# Altium PCB maxout_conn.PcbDoc
Units mil, origin at the board's own origin, x right, y up, seen from the top; angles counter-clockwise.
Board outline 1878 x 2120 mil, 2 copper layers (Top Layer, Bottom Layer); 29 components, 58 nets, 219 pads, 37 vias.
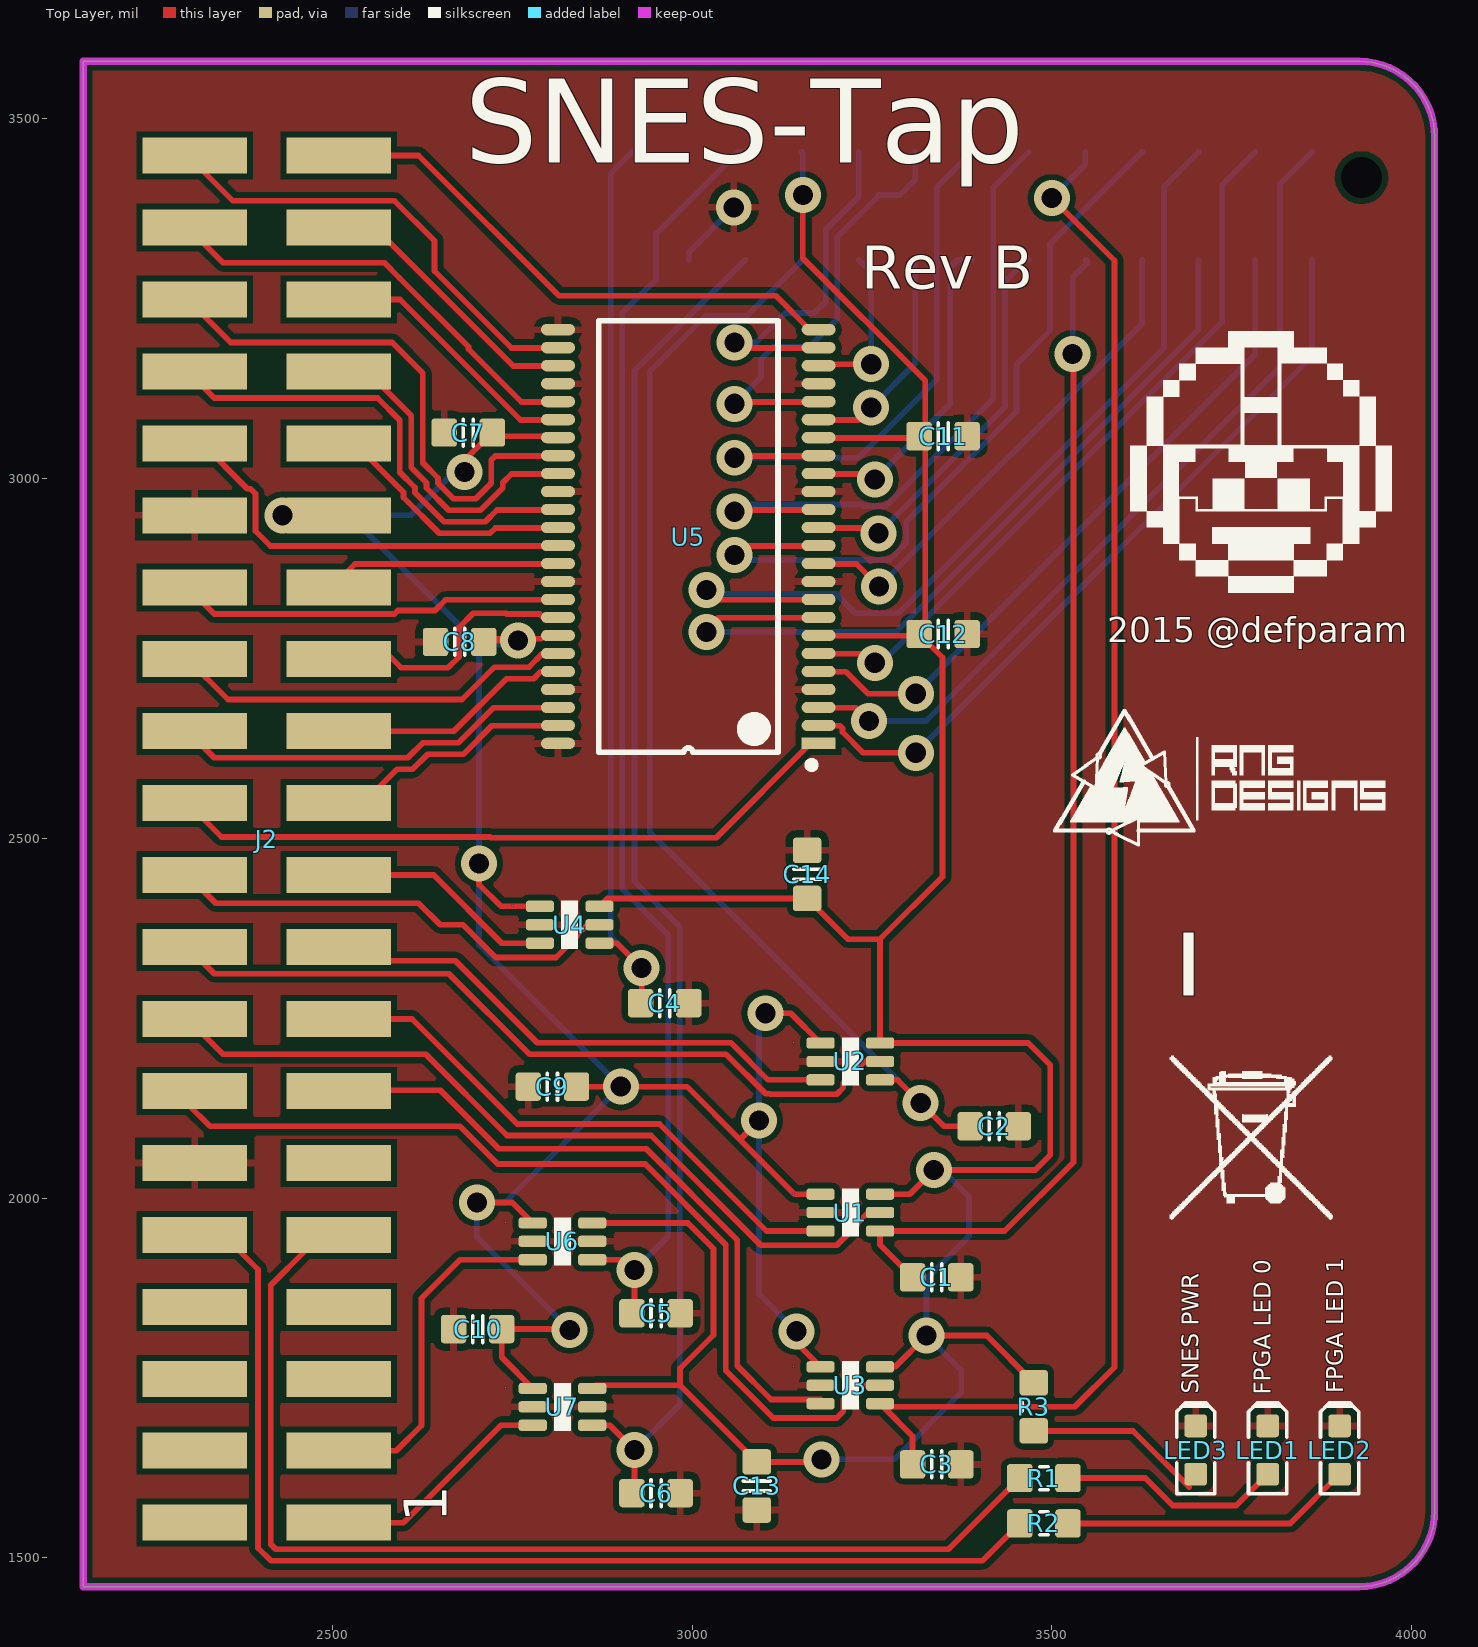
[diagram p0: Top Layer view]
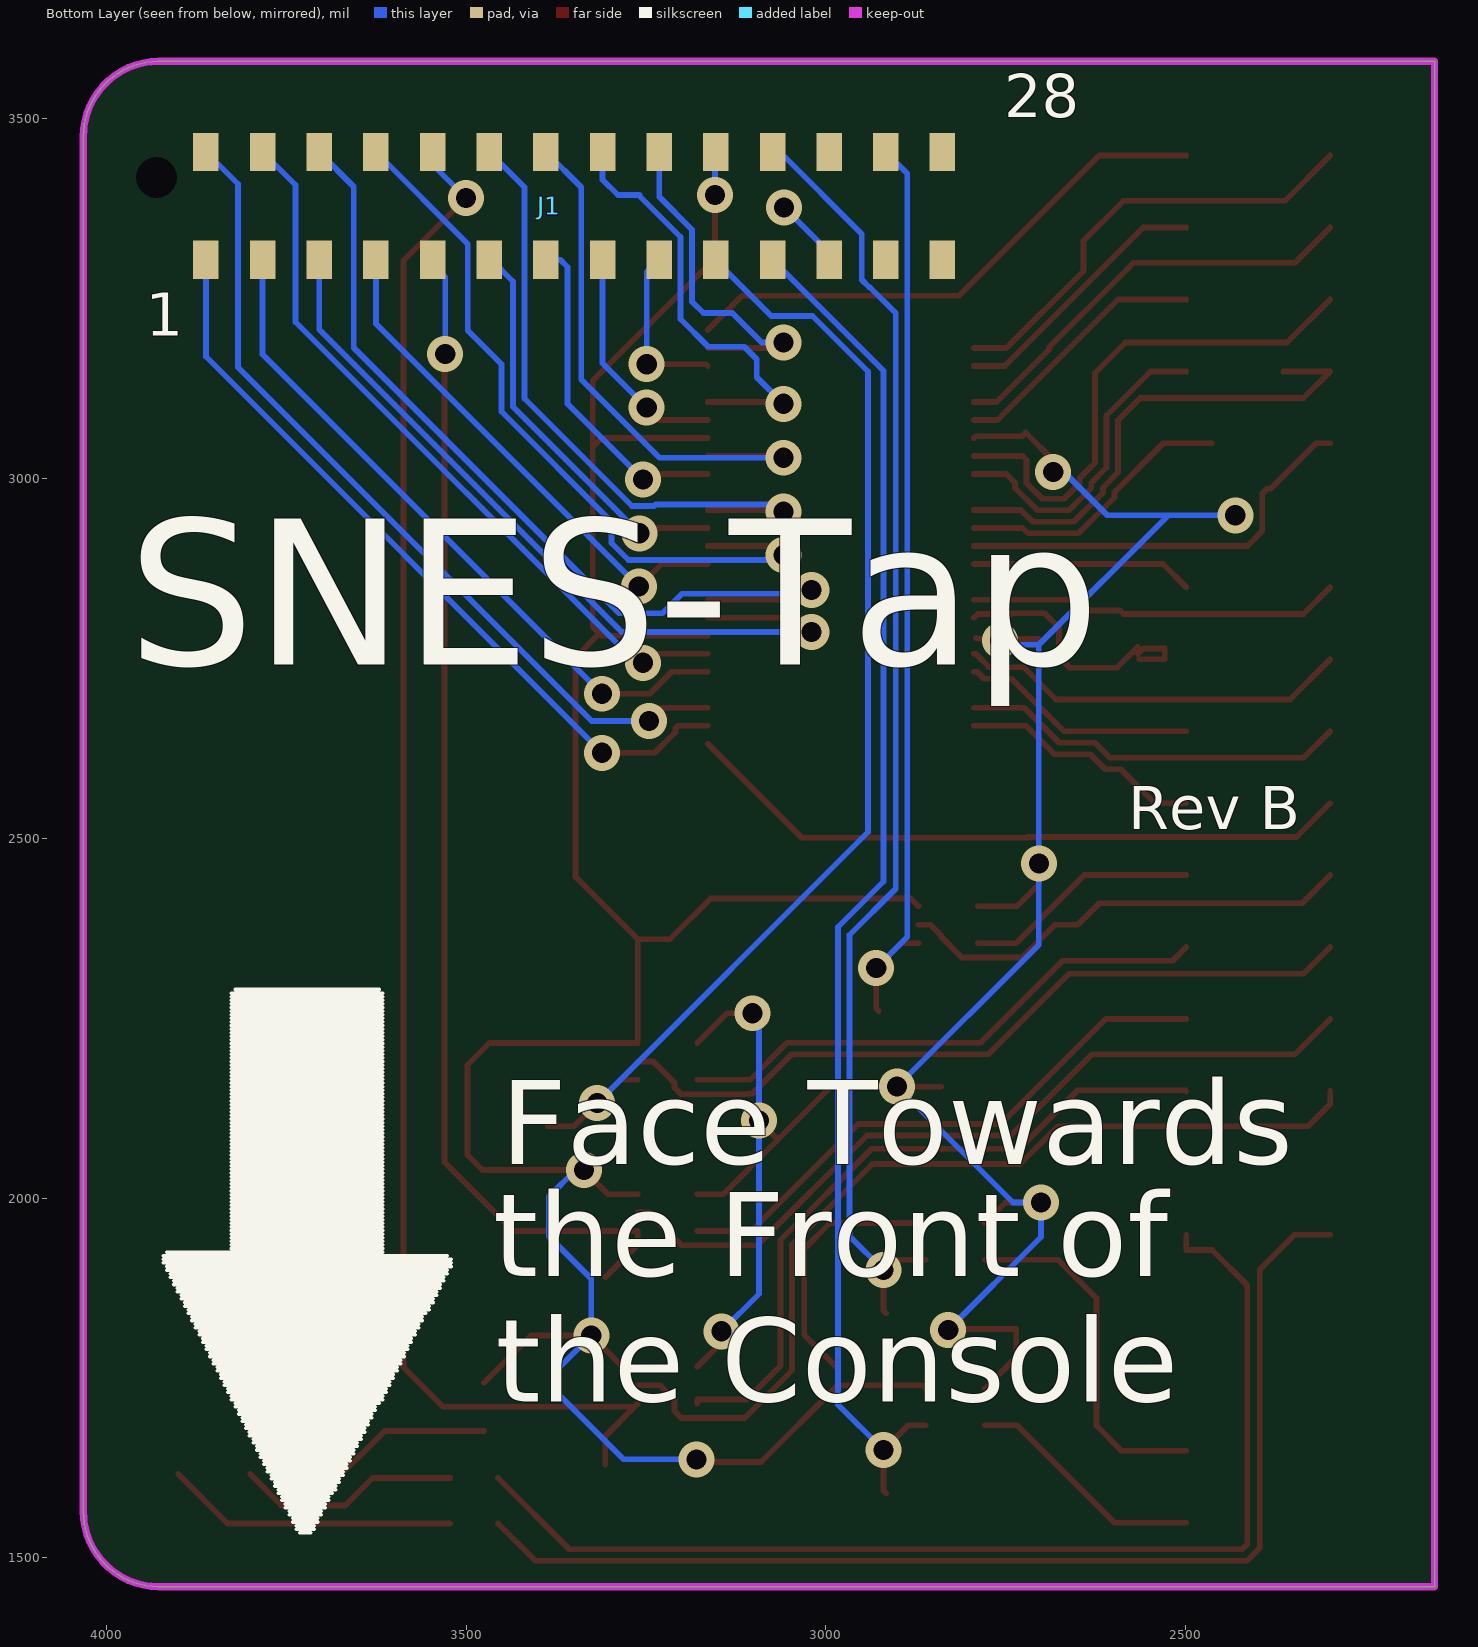
[diagram p1: Bottom Layer view, seen from below]
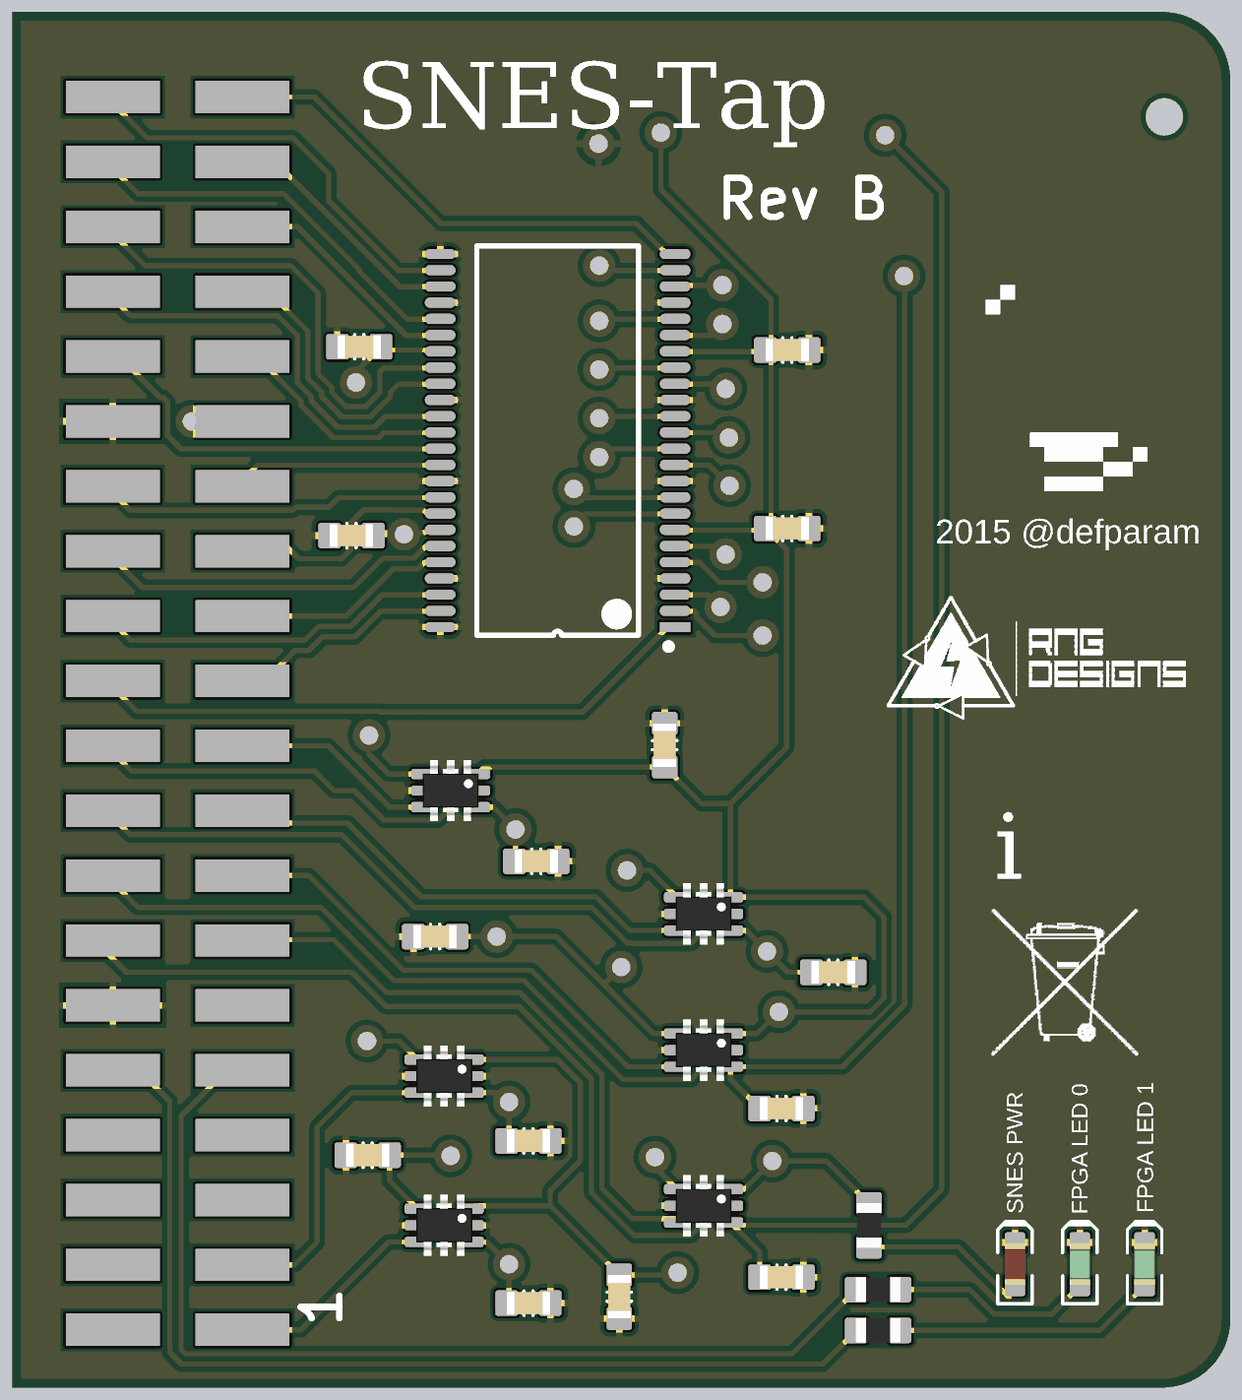
[diagram p2: 3D render of the assembled board from above, using the file's embedded part models]

## Layer stack, top to bottom
Top Solder: solder mask 0.4, Solder Resist, Dk 3.5
Top Layer: signal copper 1.4
Dielectric 1: dielectric 12.6, FR-4, Dk 4.8
Bottom Layer: signal copper 1.4
Bottom Solder: solder mask 0.4, Solder Resist, Dk 3.5

## Board outline
2154,1460 2154,3580 3927,3580 cw(c3927,3475) 4032,3475 4032,1565 cw(c3927,1565) 3927,1460

## Design rules (kind name [scope] priority, off if disabled: settings)
Clearance [All] p1: gap=8
PolygonConnect [All] p1: connectstyle=Relief reliefconductorwidth=10 reliefentries=4 polygonreliefangle="90 Angle" airgapwidth=10
RoomDefinition maxout_conn [InComponentClass('maxout_conn')] p1: confinementstyle=ConfineOut formatcopy=TRUE lockcomponents=FALSE outline 1685,0 4170,0 ccw(c4170,100) 4270,100 4270,830 ccw(c4260,830) 4260,840 1680,840
RoutingVias [All] p1: holewidth=25 width=40 viastyle="Through Hole" minholewidth=28 minwidth=50 maxholewidth=28 maxwidth=50
SolderMaskExpansion [All] p1: expansion=4
UnpouredPolygon [All] p1: allowunpoured=FALSE
Width [All] p1: maxlimit=8 minlimit=8 preferedwidth=8
29 further rules are at their usual default settings.

## Components (designator, comment, footprint, x,y, rotation, side; value= is the part's Value field where it differs from the comment)
C1 "10p" CAPC1608X90N 3340,1890 r0 top
C2 "10p" CAPC1608X90N 3420,2100 r0 top
C3 "10p" CAPC1608X90N 3340,1630 r0 top
C4 "10p" CAPC1608X90N 2962,2271 r0 top
C5 "10p" CAPC1608X90N 2950,1840 r0 top
C6 "10p" CAPC1608X90N 2950,1590 r0 top
C7 "approved sub OK" CAPC1608X90N 2689,3064 r180 top
C8 "approved sub OK" CAPC1608X90N 2677,2773 r180 top
C9 "approved sub OK" CAPC1608X90N 2806,2155 r180 top
C10 "approved sub OK" CAPC1608X90N 2702,1818 r180 top
C11 "approved sub OK" CAPC1608X90N 3349,3059 r0 top
C12 "approved sub OK" CAPC1608X90N 3349,2784 r0 top
C13 "approved sub OK" CAPC1608X90N 3090,1600 r270 top
C14 "approved sub OK" CAPC1608X90N 3160,2450 r90 top
J1 "SNESConn" SNES-MEC2-CONN 2769,3379 r0 top
J2 "DE0nanoIDC_40" SNESConnIDC_40 2408.98,2849 r270 top
LED1 "Green" LED-0603-GREEN 3800,1650 r90 top
LED2 "Green" LED-0603-GREEN 3900,1650 r90 top
LED3 "Red" LED-0603-RED 3700,1650 r90 top
R1 "Thick Film" RESC1608X55N 3489,1611 r0 top
R2 "Thick Film" RESC1608X55N 3489,1548 r0 top
R3 "Thick Film" RESC1608X55N 3475,1710 r270 top
U1 "74LVCH1T45" SOT363 3220,1980 r0 top
U2 "74LVCH1T45" SOT363 3220,2190 r0 top
U3 "74LVCH1T45" SOT363 3220,1740 r0 top
U4 "74LVCH1T45" SOT363 2830,2380 r0 top
U5 "74ALVC164245" SSOP48 3181,3247 r180 top
U6 "74LVCH1T45" SOT363 2820,1940 r0 top
U7 "74LVCH1T45" SOT363 2820,1710 r0 top

## Footprints (in the part's own frame and the unit in brackets; to place one, negate y for a bottom-side part, rotate by r counter-clockwise, add the part's x,y. Pads: shape width x height; smd on the part's side, far side on the other; paste and mask are expansions set on the pad)
CAPC1608X90N [mm] "Chip Capacitor, Body 1.6x0.8mm, EIA 0603, IPC Medium Density"
  round 0.254 on Mech15: 0(0,0)
  rrect25% 0.9x1 smd: 1(-0.85,0) 2(0.85,0)
  Top Layer pour cut-out: -0.6,0.5 -0.4,0.7 0.4,0.7 0.6,0.5 0.6,-0.5 0.4,-0.7 -0.4,-0.7 -0.6,-0.5
  silkscreen extent -0.18,-0.48 0.18,0.48, body extent -0.85,-0.45 0.85,0.45, height 0.89
LED-0603-GREEN [mm]
  round 0.254 on Mech15: 0(0,0)
  rrect25% 0.8x0.8 smd: A(-0.85,0) K(0.85,0)
  Top Layer pour cut-out: -0.5,0.5 0.5,0.5 0.5,-0.5 -0.5,-0.5
  silkscreen extent -1.55,-0.67 1.68,0.67, body extent -0.8,-0.4 0.8,0.4, height 0.75
LED-0603-RED [mm]
  round 0.254 on Mech15: 0(0,0)
  rrect25% 0.8x0.8 smd: A(-0.85,0) K(0.85,0)
  Top Layer pour cut-out: -0.5,0.5 0.5,0.5 0.5,-0.5 -0.5,-0.5
  silkscreen extent -1.55,-0.67 1.68,0.67, body extent -0.8,-0.4 0.8,0.4, height 0.75
RESC1608X55N [mm] "Chip Resistor, Body 1.6x0.8mm, EIA 0603, IPC Medium Density"
  round 0.254 on Mech15: 0(0,0)
  rrect25% 0.9x1 smd: 1(-0.85,0) 2(0.85,0)
  Top Layer pour cut-out: -0.6,0.5 -0.4,0.7 0.4,0.7 0.6,0.5 0.6,-0.5 0.4,-0.7 -0.4,-0.7 -0.6,-0.5
  silkscreen extent -0.15,-0.41 0.15,0.41, body extent -0.87,-0.47 0.88,0.48, height 0.54
SNES-MEC2-CONN [mm] "Male connector for the EXT socket on the SNES"
  rect 0.9x1.35 smd far side: 1(27.75,-1.9) 2(27.75,1.9) 3(25.75,-1.9) 4(25.75,1.9) 5(23.75,-1.9) 6(23.75,1.9) 7(21.75,-1.9) 8(21.75,1.9) 9(19.75,-1.9) 10(19.75,1.9) 11(17.75,-1.9) 12(17.75,1.9) 13(15.75,-1.9) 14(15.75,1.9) 15(13.75,-1.9) 16(13.75,1.9) 17(11.75,-1.9) 18(11.75,1.9) 19(9.75,-1.9) 20(9.75,1.9) 21(7.75,-1.9) 22(7.75,1.9) 23(5.75,-1.9) 24(5.75,1.9) 25(3.75,-1.9) 26(3.75,1.9) 27(1.75,-1.9) 28(1.75,1.9)
  round 0 hole 1.45: ""(29.5,1)
  body extent 1.3,-2.58 30.4,2.58, height 5
SNESConnIDC_40 [mil]
  rect 50x145 smd: 1(1300,100) 2(1300,-100) 3(1200,100) 4(1200,-100) 5(1100,100) 6(1100,-100) 7(1000,100) 8(1000,-100) 9(900,100) 10(900,-100) 11(800,100) 12(800,-100) 13(700,100) 14(700,-100) 15(600,100) 16(600,-100) 17(500,100) 18(500,-100) 19(400,100) 20(400,-100) 21(300,100) 22(300,-100) 23(200,100) 24(200,-100) 25(100,100) 26(100,-100) 27(0,100) 28(0,-100) 29(-100,100) 30(-100,-100) 31(-200,100) 32(-200,-100) 33(-300,100) 34(-300,-100) 35(-400,100) 36(-400,-100) 37(-500,100) 38(-500,-100) 39(-600,100) 40(-600,-100)
  body extent -625,-150 1325,150, height 250
SOT363 [mm] "Small outline 2.1mm L x 1.25mm W x 1mm H"
  round 0.5 on Mech15: 0(0,0)
  rrect50% 1x0.4 smd: 1(-1.05,0.65) 2(-1.05,0) 3(-1.05,-0.65) 4(1.05,-0.65) 5(1.05,0) 6(1.05,0.65)
  silkscreen extent -0.3,-0.85 0.3,0.85, body extent -1.2,-1.1 1.2,1.1, height 1.1
SSOP48 [mm] "SOP, 48-Leads, Body 15.88x7.50mm, Pitch 0.64mm, IPC Medium Density"
  rect 1.2x0.4 smd: 1(0.127,15.621)
  oval 1.2x0.4 smd: 2(0.127,14.986) 3(0.127,14.351) 4(0.127,13.716) 5(0.127,13.081) 6(0.127,12.446) 7(0.127,11.811) 8(0.127,11.176) 9(0.127,10.541) 10(0.127,9.906) 11(0.127,9.271) 12(0.127,8.636) 13(0.127,8.001) 14(0.127,7.366) 15(0.127,6.731) 16(0.127,6.096) 17(0.127,5.461) 18(0.127,4.826) 19(0.127,4.191) 20(0.127,3.556) 21(0.127,2.921) 22(0.127,2.286) 23(0.127,1.651) 24(0.127,1.016) 25(9.327,1.016) 26(9.327,1.651) 27(9.327,2.286) 28(9.327,2.921) 29(9.327,3.556) 30(9.327,4.191) 31(9.327,4.826) 32(9.327,5.461) 33(9.327,6.096) 34(9.327,6.731) 35(9.327,7.366) 36(9.327,8.001) 37(9.327,8.636) 38(9.327,9.271) 39(9.327,9.906) 40(9.327,10.541) 41(9.327,11.176) 42(9.327,11.811) 43(9.327,12.446) 44(9.327,13.081) 45(9.327,13.716) 46(9.327,14.351) 47(9.327,14.986) 48(9.327,15.621)
  silkscreen extent 0.26,0.7 7.89,16.51, body extent 0.92,0.36 8.52,16.36, height 2.8

## Part data
C1 C2 C3 C4 C5 C6: library part CAPC_10p_0603_NP0_1%_50V, "Capacitor SMD Cer 10pF 5% 50V NP0 0603"
C7 C8 C9 C10 C11 C12 C13 C14: library part CAPC_100n_0603_X7R_50V_10%, "Capacitor SMD Cer 100nF 10% 50V X7R 0603"
LED1 LED2: library part LED_SMD_Green_0603_570nm, "LED 0603 SMD Green 570nm 50mcd 20mA"
LED3: library part LED_SMD_Red_0603_220mcd, "LED 0603 SMD Hyper Red 630nm 220mcd 20mA"
R1 R2: library part RES_200R_0603_5%, "Resistor SMD chip 200 Ohm 0.1W 5% 0603"
R3: library part RES_270R_0603_5%, "Resistor SMD chip 270 Ohm 0.1W 5% 0603"
U1 U2 U3 U4 U6 U7: library part 74AVCH1T45, "Dual-supply voltage level translator/transceiver; 3-state"
U5: "16-bit dual supply translating transceiver; 3-state"

## Via types
v1: diameter 50, hole 28, Top Layer to Bottom Layer, tented both sides, 37 vias

## Nets (pads, with @x,y where several pads share a name; then routed paths per layer and width w, separated by ;. In a path a pad name is that pad's centre, name@x,y a point inside that pad or via, vN(x,y) a via of type N, cw(c..) or ccw(c..) an arc to the next point about the centre after c; other vN are vias at no path point)
GND: C1.2 C2.2 C3.2 C4.2 C5.2 C6.2 C7.2 C8.2 C9.2 C10.2 C11.2 C12.2 C13.2 C14.2 J1.23 J2.12 J2.30 LED1.K LED2.K LED3.K U1.2 U2.2 U3.2 U4.2 U5.4 U5.10 U5.15 U5.21 U5.25 U5.28 U5.34 U5.39 U5.45 U5.48 U6.2 U6.5 U7.2 U7.5 | length 98.7
  Bottom Layer w8: J1.23 2995.38,3314.38 v1(3058,3377)
NetC1_1: C1.1 J1.9 U1.4 | length 1701.1
  Top Layer w8: C1.1 3261.34,1935.2 U1.4 3434.41,1954.41 3530,2050 3530,3186 3543,3173 v1(3529,3173)
  Bottom Layer w8: v1(3529,3173) 3529,3279.76 3550,3300.76 J1.9
NetC2_1: C2.1 J1.19 U2.4 | length 1601
  Top Layer w8: U2.4 3285.59,2164.41 v1(3317.8,2132.2) 3350,2100 C2.1
  Bottom Layer w8: J1.19 3152.86,3302.86 3076,3226 3018.63,3226 2941.31,3148.69 2941.31,2508.69 v1(3317.8,2132.2)
NetC3_1: C3.1 J1.10 U3.4 | length 2191.3
  Top Layer w8: U3.4 U3.4@3265.75,1710 ; C3.1 3306.54,1669.21 U3.4@3265.75,1710 ; v1(3500,3390) 3587,3303 3587,1765 3532,1710 U3.4@3265.75,1710
  Bottom Layer w8: v1(3500,3390) 3546.56,3436.56 J1.10
NetC4_1: C4.1 J1.26 U4.4 | length 1298.3
  Top Layer w8: U4.4 2895.59,2354.41 v1(2930,2320) 2930,2263.46 C4.1@2926.54,2260
  Bottom Layer w8: J1.26 2886.92,3424.09 2886.92,2363.08 v1(2930,2320)
NetC5_1: C5.1 J1.22 U6.4 | length 1803.3
  Top Layer w8: U6.4 2905.59,1914.41 v1(2920,1900) 2920,1843.46 C5.1
  Bottom Layer w8: v1(2920,1900) 2967,1947 2967,2365.92 2902.92,2430 2902.92,3230 2938.54,3265.62 2939.32,3265.62 2950,3276.3 2950,3340 3063.8,3453.8 J1.22
NetC6_1: C6.1 J1.21 U7.4 | length 1904.6
  Top Layer w8: U7.4 2885.59,1684.41 v1(2920,1650) 2920,1593.46 C6.1
  Bottom Layer w8: v1(2920,1650) 2983,1713 2983,2377 2920,2440 2920,3150 3074.12,3304.12 J1.21
NetJ1_1: J1.1 U5.2 | length 1078.8
  Top Layer w8: U5.2@3164.04,2656.5 3205.5,2656.5 3209,2653 3209,2647.67 3237.67,2619 v1(3311,2619)
  Bottom Layer w8: v1(3311,2619) 3861.52,3169.52 J1.1
NetJ1_2: J1.2 U5.3 | length 1181.9
  Top Layer w8: U5.3@3164.04,2681.5 3227.5,2681.5 v1(3246,2663)
  Bottom Layer w8: v1(3246,2663) 3325.33,2663 3817,3154.67 3817,3409.28 J1.2
NetJ1_3: J1.3 U5.5 | length 958.2
  Top Layer w8: U5.5@3164.04,2731.5 3214.17,2731.5 3244.67,2701 v1(3311,2701)
  Bottom Layer w8: v1(3311,2701) 3782.78,3172.78 J1.3
NetJ1_4: J1.4 U5.6 | length 1029.4
  Top Layer w8: U5.6@3164.04,2756.5 3241.5,2756.5 v1(3254,2744)
  Bottom Layer w8: v1(3254,2744) 3263.25,2744 3737,3217.75 3737,3408.02 J1.4
NetJ1_5: J1.5 U5.8 | length 1108.8
  Top Layer w8: v1(3020,2787) 3020,2790 3036.5,2806.5 U5.8@3164.04,2806.5
  Bottom Layer w8: v1(3020,2787) 3283.63,2787 3704.04,3207.41 J1.5
NetJ1_6: J1.6 U5.9 | length 1243.4
  Top Layer w8: v1(3020,2845) 3033.5,2831.5 U5.9@3164.04,2831.5
  Bottom Layer w8: v1(3020,2845) 3025,2840 3200,2840 3227,2813 3287,2813 3656,3182 3656,3405.76 J1.6
NetJ1_7: J1.7 U5.11 | length 714.5
  Top Layer w8: U5.11@3164.04,2881.5 3228.5,2881.5 v1(3260,2850)
  Bottom Layer w8: v1(3260,2850) 3625.3,3215.3 J1.7
NetJ1_8: J1.8 U5.12 | length 1040.6
  Top Layer w8: v1(3059,2894) 3071.5,2906.5 U5.12@3164.04,2906.5
  Bottom Layer w8: v1(3059,2894) 3066,2887 3274.33,2887 3297.81,2910.49 3297.81,2940.19 3450.8,3093.17 3450.8,3159 3497.54,3205.74 3497.54,3326.04 J1.8
NetJ1_11: J1.11 U5.13 | length 566.4
  Top Layer w8: U5.13@3164.04,2931.5 3251.5,2931.5 v1(3259,2924)
  Bottom Layer w8: v1(3259,2924) 3434.8,3099.8 3434.8,3274 3464.99,3304.2 J1.11
NetJ1_12: J1.12 U5.14 | length 895.4
  Top Layer w8: v1(3059,2954) 3061.5,2956.5 U5.14@3164.04,2956.5
  Bottom Layer w8: v1(3059,2954) 3069,2964 3236.67,2964 3238.67,2962 3269.33,2962 3418.8,3111.47 3418.8,3404.78 J1.12
NetJ1_13: J1.13 U5.16 | length 465.9
  Top Layer w8: U5.16@3164.04,3006.5 3246.5,3006.5 v1(3254,2999)
  Bottom Layer w8: v1(3254,2999) 3359,3104 3359,3294 3369.2,3304.2 J1.13
NetJ1_14: J1.14 U5.17 | length 768.5
  Top Layer w8: v1(3059,3029) 3061.5,3031.5 U5.17@3164.04,3031.5
  Bottom Layer w8: v1(3059,3029) 3231.33,3029 3340.06,3137.73 3340.06,3404.78 J1.14
NetJ1_15: J1.15 U5.19 | length 322.8
  Top Layer w8: U5.19@3164.04,3081.5 3231.5,3081.5 v1(3249,3099)
  Bottom Layer w8: v1(3249,3099) 3310.34,3160.34 J1.15
NetJ1_16: J1.16 U5.20 | length 606.8
  Top Layer w8: v1(3059,3104) 3061.5,3106.5 U5.20@3164.04,3106.5
  Bottom Layer w8: v1(3059,3104) 3096,3141 3096,3166 3113.3,3183.3 3163.3,3183.3 3201.88,3221.88 3201.88,3335.74 3259,3392.86 3259,3394 3289,3394 3310.34,3415.34 J1.16
NetJ1_17: J1.17 U5.22 | length 238.4
  Top Layer w8: U5.22@3164.04,3156.5 3166.54,3159 v1(3249,3159)
  Bottom Layer w8: J1.17 3249,3286.8 v1(3249,3159)
NetJ1_18: J1.18 U5.23 | length 485.4
  Top Layer w8: v1(3059,3189) 3066.5,3181.5 U5.23@3164.04,3181.5
  Bottom Layer w8: v1(3059,3189) 3089,3189 3130,3230 3170,3230 3185.88,3245.88 3185.88,3345.88 3231.6,3391.6 J1.18
NetJ2_1: J2.1 U7.3 | length 335.7
  Top Layer w8: J2.1@2499,1549 2599,1549 2734.41,1684.41 U7.3
NetJ2_3: J2.3 U6.3 | length 493.3
  Top Layer w8: J2.3@2499,1649 2589,1649 2624,1684 2624,1861 2677.41,1914.41 U6.3
NetJ2_9: J2.9 R1.1 | length 1570.7
  Top Layer w8: J2.9@2499,1949 2499,1928 2463.53,1928 2414.5,1878.97 2414.5,1519.03 2421.53,1512 3356.54,1512 R1.1
NetJ2_10: J2.10 R2.1 | length 1592.5
  Top Layer w8: J2.10@2299,1949 2349,1949 2397,1901 2397,1513.9 2414.9,1496 3403.54,1496 R2.1
NetJ2_13: J2.13 U3.3 | length 966.4
  Top Layer w8: J2.13@2499,2149 2500,2150 2650,2150 2731.31,2068.69 2936.31,2068.69 3063,1942 3063,1767 3109.87,1720.13 3178.66,1720.13 U3.3
NetJ2_14: J2.14 U3.5 | length 1291.9
  Top Layer w8: J2.14@2299,2149 2299,2131 2330,2100 2677.37,2100 2730,2047.37 2935,2047.37 3047,1935.37 3047,1760.37 3112.84,1694.54 3201.01,1694.54 3210.35,1703.87 3210.35,1719.92 3230.43,1740 U3.5
NetJ2_15: J2.15 U1.3 | length 801.7
  Top Layer w8: J2.15@2499,2249 2611,2249 2757,2103 2955,2103 3103.59,1954.41 U1.3
NetJ2_16: J2.16 U1.5 | length 1112.5
  Top Layer w8: J2.16@2299,2249 2348,2200 2630,2200 2743,2087 2943,2087 3095.46,1934.54 3201.01,1934.54 3229.65,1963.18 3229.65,1964.95 3244.71,1980 U1.5
NetJ2_17: J2.17 U2.3 | length 756.1
  Top Layer w8: J2.17@2499,2349 2518,2330 2671,2330 2785,2216 3054,2216 3105.59,2164.41 U2.3
NetJ2_18: J2.18 U2.5 | length 1069.7
  Top Layer w8: J2.18@2299,2349 2336,2312 2662,2312 2774,2200 3047.37,2200 3102.37,2145 3108.33,2145 3108.79,2144.54 3201.01,2144.54 3210.35,2153.87 3210.35,2160.35 3240,2190 U2.5
NetJ2_19: J2.19 U4.3 | length 328.8
  Top Layer w8: J2.19@2499,2449 2641,2449 2735.59,2354.41 U4.3
NetJ2_20: J2.20 U4.5 | length 639.6
  Top Layer w8: J2.20@2299,2449 2338,2410 2620,2410 2650,2380 2681.63,2380 2727.09,2334.54 2811.01,2334.54 2839.65,2363.18 2839.65,2364.95 2854.71,2380 U4.5
NetJ2_21: J2.21 U5.47 | length 339.5
  Top Layer w8: J2.21@2499,2549 2543.13,2549 2590.13,2596 2611.63,2596 2632.63,2617 2682.25,2617 2721.75,2656.5 U5.47@2793.96,2656.5
NetJ2_22: J2.22 U5.1 | length 939
  Top Layer w8: J2.22@2299,2549 2346,2502 2719.33,2502 2720.33,2501 3033.54,2501 U5.1@3164.04,2631.5
NetJ2_23: J2.23 U5.44 | length 329.1
  Top Layer w8: J2.23@2499,2649 2669,2649 2742,2722 2779.95,2722 2789.45,2731.5 U5.44@2793.96,2731.5
NetJ2_24: J2.24 U5.46 | length 539.1
  Top Layer w8: J2.24@2299,2649 2336,2612 2605,2612 2626,2633 2675.63,2633 2724.13,2681.5 U5.46@2793.96,2681.5
NetJ2_25: J2.25 U5.41 | length 398.5
  Top Layer w8: J2.25@2564,2749 2529,2749 2529,2764 2558.76,2764 2566.63,2756.13 2566.63,2766.13 2595.44,2737.31 2660.69,2737.31 2661,2737 2676,2752 2676,2793 2696,2813 2741.67,2813 2742.67,2812 2788.46,2812 U5.41@2793.96,2806.5
NetJ2_26: J2.26 U5.43 | length 544.5
  Top Layer w8: J2.26@2299,2749 2355,2693 2680.33,2693 2725.33,2738 2773.33,2738 2791.83,2756.5 U5.43@2793.96,2756.5
NetJ2_27: J2.27 U5.38 | length 308.4
  Top Layer w8: J2.27@2499,2849 2531.5,2881.5 U5.38@2793.96,2881.5
NetJ2_28: J2.28 U5.40 | length 518.5
  Top Layer w8: J2.28@2299,2849 2336,2812 2586.45,2812 2591.14,2816.69 2642.26,2816.69 2642.47,2816.47 2657.5,2831.5 U5.40@2793.96,2831.5
NetJ2_31: J2.31 U5.36 | length 389.1
  Top Layer w8: J2.31@2464,3049 2531,3049 2599,2981 2599,2973.79 2648.79,2924 2719.21,2924 2726.71,2931.5 U5.36@2793.96,2931.5
NetJ2_32: J2.32 U5.37 | length 584.3
  Top Layer w8: J2.32@2299,3049 2319,3049 2382,2986 2386.45,2986 2393.48,2978.97 2393.48,2927.19 2414.17,2906.5 U5.37@2793.96,2906.5
NetJ2_33: J2.33 U5.33 | length 446.7
  Top Layer w8: J2.33@2499,3149 2548.63,3149 2609.82,3087.81 2609.82,3015.44 2631,2994.25 2631,2987.05 2662.05,2956 2705.95,2956 2737,2987.05 2737,2994.3 2749.2,3006.5 U5.33@2793.96,3006.5
NetJ2_34: J2.34 U5.35 | length 700
  Top Layer w8: J2.34@2364,3149 2299,3149 2336,3112 2563,3112 2593.82,3081.18 2593.82,3008.81 2615,2987.63 2615,2980.42 2655.42,2940 2712.58,2940 2729.08,2956.5 U5.35@2793.96,2956.5
NetJ2_35: J2.35 U5.30 | length 364.3
  Top Layer w8: J2.35@2499,3249 2594,3249 2761.5,3081.5 U5.30@2793.96,3081.5
NetJ2_36: J2.36 U5.32 | length 730.5
  Top Layer w8: J2.36@2299,3249 2359,3189 2583.45,3189 2625.82,3146.63 2625.82,3022.06 2647,3000.88 2647,2993.67 2668.67,2972 2699.33,2972 2721,2993.67 2721,3026 2726.5,3031.5 U5.32@2793.96,3031.5
NetJ2_37: J2.37 U5.27 | length 374.7
  Top Layer w8: J2.37@2499,3349 2559,3349 2751.5,3156.5 U5.27@2793.96,3156.5
NetJ2_38: J2.38 U5.29 | length 597.2
  Top Layer w8: J2.38@2299,3349 2348,3300 2572.45,3300 2593.48,3278.97 2689.23,3183.23 2689.23,3180.16 2762.89,3106.5 U5.29@2793.96,3106.5
NetJ2_39: J2.39 U5.24 | length 765.5
  Top Layer w8: J2.39@2499,3449 2620,3449 2815,3254 3116.54,3254 U5.24@3164.04,3206.5
NetJ2_40: J2.40 U5.26 | length 630.2
  Top Layer w8: J2.40@2299,3449 2362,3386 2586.45,3386 2642,3330.45 2642,3288.7 2749.2,3181.5 U5.26@2793.96,3181.5
NetLED1_A: LED1.A R1.2 | length 311.3
  Top Layer w8: R1.2 3630,1611 3668,1573 3756.46,1573 LED1.A
NetLED2_A: LED2.A R2.2 | length 405.9
  Top Layer w8: R2.2 3831.46,1548 LED2.A
NetLED3_A: LED3.A R3.2 | length 248.3
  Top Layer w8: R3.2 3613,1676.54 3691,1598.54
VCC3_3: C7.1 C8.1 C9.1 C10.1 J2.29 U1.1 U2.1 U3.1 U4.1 U5.31 U5.42 U6.1 U7.1 | length 3536.7
  Top Layer w8: v1(2684,3009) 2684,3025.54 C7.1 2727.46,3059 2791.46,3059 U5.31@2793.96,3056.5 ; v1(2701,1994) 2750.25,1994 U6.1 ; v1(2704,2465) 2704,2436 2734.41,2405.59 U4.1 ; v1(2758,2775) 2706.36,2775 2704,2777.36 2789.82,2777.36 U5.42@2791.46,2779 ; U7.1 2735.46,1778.79 C10.1 2829,1818 v1(2830,1817) ; C9.1 v1(2901,2155) 2993,2155 3067.7,2080.3 ; v1(3093,2108) 3067.7,2082.7 3067.7,2080.3 ; v1(3102,2257) 3137.25,2257 U2.1 ; v1(3145,1815) 3145,1799.25 U3.1 ; U1.1 3142.41,2005.59 3067.7,2080.3
  Bottom Layer w8: v1(2431,2949) 2524,2949 ; v1@2666,3009 2666,3006 2609,2949 2524,2949 ; v1@2669,3009 v1(2684,3009) ; v1(2758,2775) 2752,2769 2704,2769 ; v1(2830,1817) 2701,1946 v1(2701,1994) 2740,1994 v1(2901,2155) 2704,2352 v1(2704,2465) 2704,2769 ; v1(3093,2108) 3093,1867 v1(3145,1815) ; v1@3093,2115 3093,2248 v1(3102,2257) ; 2524,2949 2704,2769
VCC5: C11.1 C12.1 C13.1 C14.1 J1.20 R3.1 U1.6 U2.6 U3.6 U4.6 U5.7 U5.18 U6.6 U7.6 | length 4360.8
  Top Layer w8: U7.6 2865.75,1740 2983.46,1740 ; U6.6 2994.15,1965.59 3030,1929.75 3030,1810 2983.46,1763.46 2983.46,1740 ; U4.6 2882.28,2416.54 C14.1 3216.54,2360 3261.34,2360 ; v1(3154,3394) 3154,3306.33 3324,3136.33 C11.1@3324,3044 ; U5.7@3164.04,2781.5 3311.5,2781.5 3324,2794 C11.1@3324,3044 ; U5.18@3164.04,3056.5 3311.5,3056.5 C11.1@3324,3044 ; v1(3180,1637) 3176.46,1633.46 C13.1 2983.46,1740 ; U3.6 3282.59,1765.59 v1(3326,1809) 3409.46,1809 R3.1 ; U1.6 3302.59,2005.59 v1(3336,2039) 3477,2039 3498,2060 3498,2185 3467.41,2215.59 U2.6 3261.34,2360 ; C12.1 3348,2751.54 3348,2446.66 3261.34,2360
  Bottom Layer w8: J1.20 3154,3452.66 v1(3154,3394) ; v1(3180,1637) 3281,1637 3374,1730 3374,1761 v1(3326,1809) 3326,1888 3385,1947 3385,2002 3348,2039 v1(3336,2039)
pads on no net: C1.0 C2.0 C3.0 C4.0 C5.0 C6.0 C7.0 C8.0 C9.0 C10.0 C11.0 C12.0 C13.0 C14.0 J1. J1.24 J1.25 J1.27 J1.28 J2.2 J2.4 J2.5 J2.6 J2.7 J2.8 J2.11 LED1.0 LED2.0 LED3.0 R1.0 R2.0 R3.0 U1.0 U2.0 U3.0 U4.0 U6.0 U7.0

## Polygon pours and split planes (outlines as drawn)
GND on Top Layer "Ground Plane" (solid, pour order 3): 2158,1460 3927,1460 ccw(c3927,1565) 4032,1565 4032,3475 ccw(c3927,3475) 3927,3580 2158,3580

## Keep-outs
Keep-Out Layer:
  the board outline again, w10

## Silkscreen, mask and mechanical layers (free items; w line width, h text height)
Top Overlay:
  drawing of 13605 lines, arcs and shapes, not listed
  text "SNES-Tap" at 2684,3401 h200
  text "Rev B" at 3235,3264 h60
  text "2015 @defparam" at 3577,2761 h60
  text "i" at 3668,2244 h200
  text "FPGA LED 1" at 3913,1729 h40 r90
  text "SNES PWR" at 3712,1728 h40 r90
  text "FPGA LED 0" at 3812,1727 h40 r90
Bottom Overlay:
  drawing of 152 lines, arcs and shapes, not listed
  text "SNES-Tap" at 3970.4,2664.8 h400
  text "Rev B" at 2580,2513 h60
  text "Face Towards" at 3452,2009 h200
  text "the Front of" at 3462,1853 h200
  text "the Console" at 3459,1679 h200
Drill Drawing:
  text ".LEGEND" at 4595,250 h60
  text "Drill Drawing." at 4590,135 h60

## Dimensions
2154,1460 to 2154,3580 on Mechanical 1

## Text inside footprints (layer, text, board x,y; h text height)
J1: Bottom Overlay "28" at 2752.27,3502.03 h60; Bottom Overlay "1" at 3945.18,3198.88 h60
J2: Top Overlay "1" at 2658.98,1549 h60 r90